# EAGLE board Terrific Jaban-Habbi (EAGLE 7.6.0)

Size 73.58 x 63.39 mm. Coordinates in mm from the lower left corner, seen from the top.
Outline: 0,0 56.82,0 56.82,53.33 0,53.33 0,0
Copper layers (1*16): Top 0.035mm / dielectric 1.5mm / Bottom 0.035mm
Design rules "default": minimum track width 10mil, minimum drill 24mil, track to track 8mil, track to pad 8mil, pad to pad 8mil, via to via 8mil, smd to smd 8mil, copper to edge 40mil, drill to drill 8mil, minimum pad ring 10mil, minimum via ring 8mil, stop-mask expansion 4mil, vias tented up to drill 0mil, thermal gap 10mil

## Footprints (pad centres in the part's own frame; a part is rotated, then mirrored left to right if it is on the bottom)
HDSP-M = drill 0.813 long: 1 -5.08,-7.62; 2 -2.54,-7.62; 3 0,-7.62; 4 2.54,-7.62; 5 5.08,-7.62; 6 5.08,7.62; 7 2.54,7.62; 8 0,7.62; 9 -2.54,7.62; 10 -5.08,7.62
0207/10 = drill 0.813 octagon: 1 -5.08,0; 2 5.08,0
DIP04YL = drill 0.813 long: 1 -3.81,-3.81; 2 -1.27,-3.81; 3 1.27,-3.81; 4 3.81,-3.81; 5 3.81,3.81; 6 1.27,3.81; 7 -1.27,3.81; 8 -3.81,3.81
ARDUINO_UNO = drill 1.016 pad 1.88: 0 63.5,50.8; 1 60.96,50.8; 2 58.42,50.8; 3 55.88,50.8; 3.3V 35.56,2.54; 4 53.34,50.8; 5 50.8,50.8; 5V 38.1,2.54; 6 48.26,50.8; 7 45.72,50.8; 8 41.656,50.8; 9 39.116,50.8; 10 36.576,50.8; 11 34.036,50.8; 12 31.496,50.8; 13 28.956,50.8; A0 50.8,2.54; A1 53.34,2.54; A2 55.88,2.54; A3 58.42,2.54; A4 60.96,2.54; A5 63.5,2.54; AREF 23.876,50.8; GND 26.416,50.8; GND. 43.18,2.54; GND.. 40.64,2.54; I/OREF 30.48,2.54; N/C 27.94,2.54; RESET 33.02,2.54; SCL 18.796,50.8; SDA 21.336,50.8; VIN 45.72,2.54 | hole 3.2: 66.04,7.62; 66.04,35.56; 15.24,50.8; 13.97,2.54

## Placement (x,y rotation side)
Digit1  [HDSP-M]  5,48.18 0 top
R1  1k‎Ω  [0207/10]  5,35.48 0 top
R2  1k‎Ω  [0207/10]  5,60.88 0 top
R3  1k‎Ω  [0207/10]  5,73.58 0 top  (outside the outline)
R4  1k‎Ω  [0207/10]  5,86.28 0 top  (outside the outline)
R5  85k‎Ω  [0207/10]  5,98.98 0 top  (outside the outline)
R9  85k‎Ω  [0207/10]  5,111.68 0 top  (outside the outline)
R10  85k‎Ω  [0207/10]  5,124.38 0 top  (outside the outline)
R11  85k‎Ω  [0207/10]  5,137.08 0 top  (outside the outline)
R12  85k‎Ω  [0207/10]  5,149.78 0 top  (outside the outline)
R13  85k‎Ω  [0207/10]  5,162.48 0 top  (outside the outline)
R14  85k‎Ω  [0207/10]  5,175.18 0 top  (outside the outline)
SW2  [DIP04YL]  5,22.78 0 top
U2  [ARDUINO_UNO]  5,10.08 0 top

## Library data of the parts
Digit1 R1-R5 R9-R14 SW2 U2 = AUTODESK_CIRCUITS_BREADBOARD

## Nets
N$1: U2.GND
N$2: R1.2 SW2.6 U2.10
N$3: R2.2 SW2.5 U2.11
N$4: R3.2 SW2.7 U2.9
N$5: R4.2 SW2.8 U2.8
N$6: SW2.1 SW2.2 SW2.3 SW2.4 U2.5V
N$7: R5.1 U2.0
N$8: Digit1.7 R5.2
N$9: Digit1.1 R12.2
N$10: Digit1.4 R11.2
N$11: Digit1.9 R13.2
N$12: Digit1.10 R14.2
N$13: Digit1.3 R1.1 R2.1 R3.1 R4.1 U2.GND..
N$14: Digit1.8
N$15: Digit1.2 R10.2
N$16: Digit1.5
N$17: Digit1.6 R9.2
N$18: R9.1 U2.1
N$19: R10.1 U2.3
N$20: R11.1 U2.2
N$21: R12.1 U2.4
N$22: R13.1 U2.5
N$23: R14.1 U2.6

## Tracks (layer width: path | path; a pad name or v marks a point on that pad's centre or on a via)
N$2  (2 unrouted)
N$3  (2 unrouted)
N$4  (2 unrouted)
N$5  (2 unrouted)
N$6  (4 unrouted)
N$7  (1 unrouted)
N$8  (1 unrouted)
N$9  (1 unrouted)
N$10  (1 unrouted)
N$11  (1 unrouted)
N$12  (1 unrouted)
N$13  (5 unrouted)
N$15  (1 unrouted)
N$17  (1 unrouted)
N$18  (1 unrouted)
N$19  (1 unrouted)
N$20  (1 unrouted)
N$21  (1 unrouted)
N$22  (1 unrouted)
N$23  (1 unrouted)